# Altium PCB PCB1.PcbDoc
Units mil, origin at the board's own origin, x right, y up, seen from the top; angles counter-clockwise.
Board outline 3937.01 x 2165.35 mil, 2 copper layers (Top Layer, Bottom Layer); 16 components, 34 nets, 149 pads, 24 vias.
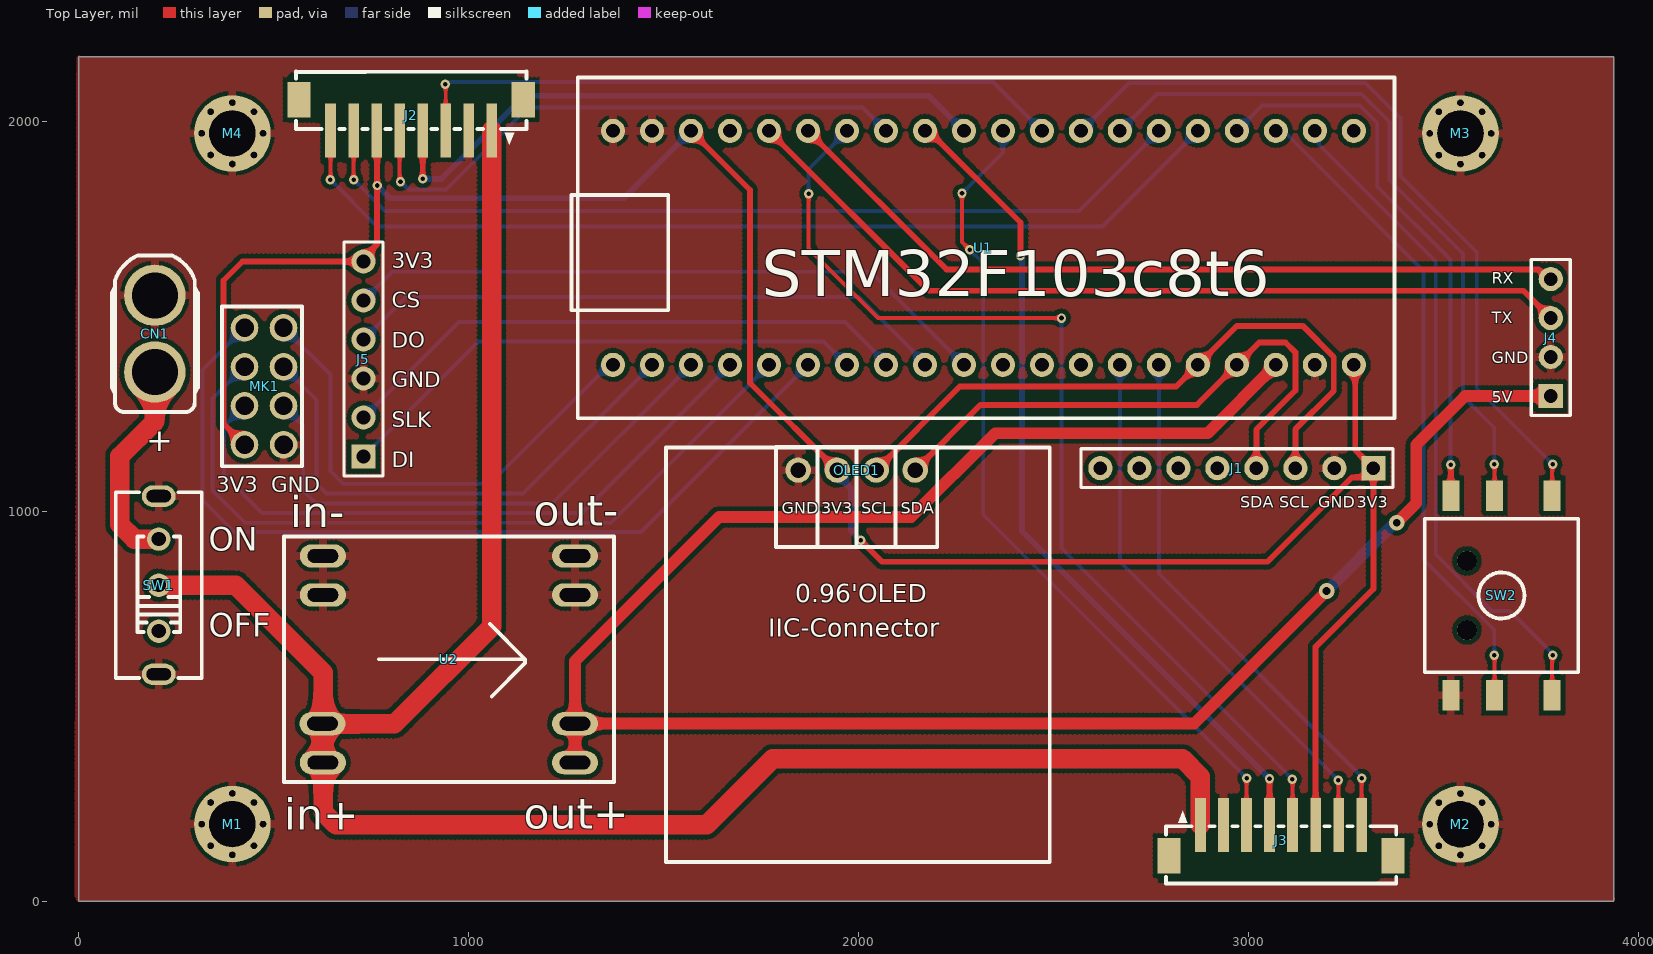
[diagram p0: Top Layer view]
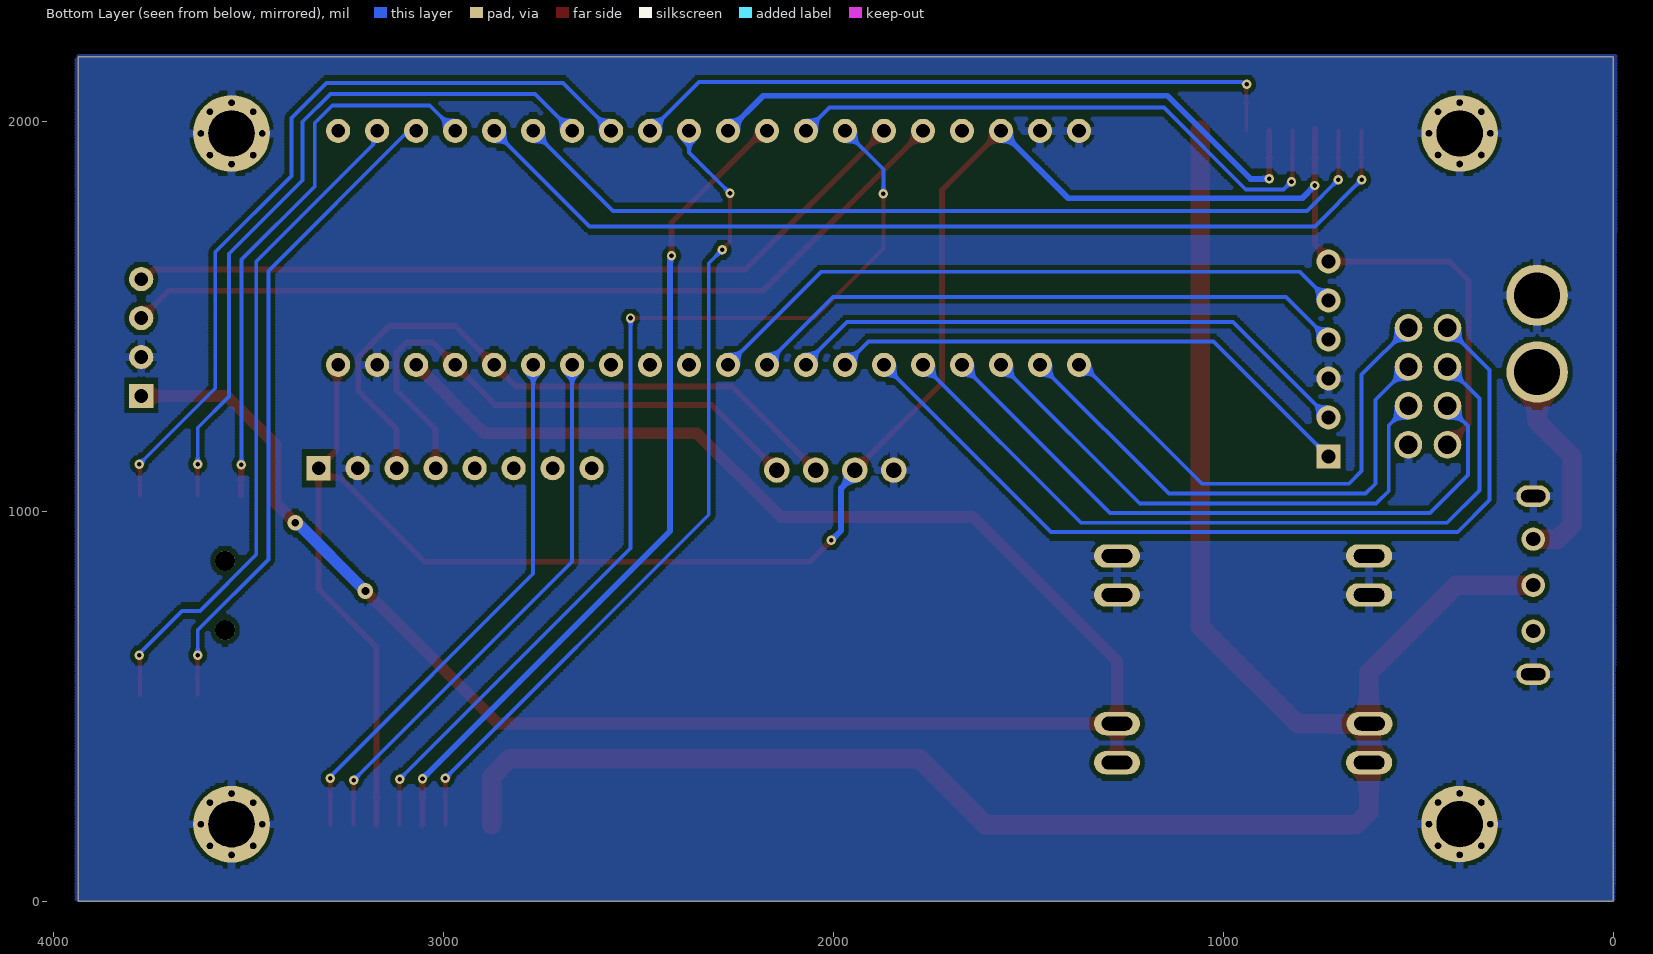
[diagram p1: Bottom Layer view, seen from below]

## Layer stack, top to bottom
Top Solder: solder mask 0.4, Solder Resist, Dk 3.5
Top Layer: signal copper 1.4
Dielectric 1: dielectric 12.6, FR-4, Dk 4.8
Bottom Layer: signal copper 1.4
Bottom Solder: solder mask 0.4, Solder Resist, Dk 3.5

## Board outline
0,0 3937.01,0 3937.01,2165.35 0,2165.35

## Design rules (kind name [scope] priority, off if disabled: settings)
Clearance [All] p1: gap=10 ignorepadtopadclearanceinfootprint=FALSE except(0: Arc-Hole Track-Hole SMDPad-Hole THPad-Hole Via-Hole Fill-Hole Poly-Hole Region-Hole Text-Hole; 12: Arc-Fill Arc-Poly Arc-Region Track-Fill Track-Poly Track-Region SMDPad-Fill SMDPad-Poly SMDPad-Region THPad-Fill THPad-Poly THPad-Region Via-Fill Via-Poly Via-Region Fill-Fill Fill-Poly Fill-Region Poly-Poly Poly-Region Region-Region)
PolygonConnect [All] p1: connectstyle=Relief reliefconductorwidth=20 reliefentries=4 polygonreliefangle="90 Angle" airgapwidth=10
RoutingVias [All] p1: holewidth=12 width=24 viastyle="Through Hole" minholewidth=12 minwidth=24 maxholewidth=12 maxwidth=24
SolderMaskExpansion [All] p1: expansion=4 istentingtop=FALSE
Width [All] p1: maxlimit=50 minlimit=10 preferedwidth=10
30 further rules are at their usual default settings.

## Components (designator, comment, footprint, x,y, rotation, side; value= is the part's Value field where it differs from the comment)
CN1 "XT30UPB-F" XT30 195,1455 r180 top locked
J1 "HDR-M-2.54_1x8" HDR-M-2.54_1X8 2920,1110 r180 top locked
J2 "zh1.5-8p" ZH1.5-8P 852.4,2019.73 r180 top locked
J3 "zh1.5-8p" ZH1.5-8P 3083.31,151.53 r0 top locked
J4 "HDR-M-2.54_1x4" HDR-M-2.54_1X4 3775,1445 r90 top
J5 "HDR-M-2.54_1x8" HDR-M-2.54_1X6 730,1390 r90 top
M1 "M3" M3 393.7,196.85 r0 top locked
M2 "M3" M3 3543.31,196.57 r0 top locked
M3 "M3" M3 3543.31,1968.23 r0 top locked
M4 "M3" M3 393.7,1968.5 r0 top locked
MK1 "NRF24L01" NRF24L01 21.2,1390.8 r90 top
OLED1 "0.96OLED_4P_MODULE_JX" 0.96OLED_4P 1995.01,1104.94 r0 top locked
SW1 "SS-12F44-G6" SW-TH_SS-12F44-GX 205,810 r90 top locked
SW2 "KEY_5" KEY_5 3518.66,527.68 r90 top
U1 "STM32F103c8t6" STM32F103COREBOARD 2211.69,1730 r0 top locked
U2 "5v_buck" 5V_BUCK 949.11,619.96 r0 top

## Footprints (in the part's own frame and the unit in brackets; to place one, negate y for a bottom-side part, rotate by r counter-clockwise, add the part's x,y. Pads: shape width x height; smd on the part's side, far side on the other; paste and mask are expansions set on the pad)
0.96OLED_4P [mm]
  round 1.65 hole 1 paste+0 mask+0.051: 1(-3.81,-0.001) 2(-1.27,0.002) 3(1.27,0.002) 4(3.81,0.002)
  silkscreen extent -12.43,-25.53 12.57,1.5
5V_BUCK [mm]
  oval 3x1.524 hole 0.9 slot 2 at 0 deg paste+0 mask+0.051: 1(-8.21,4.19) 1(-8.21,6.73) 2(-8.232,-4.19) 2(-8.21,-6.73) 3(8.21,6.73) 3(8.21,4.19) 4(8.21,-6.73) 4(8.21,-4.19)
  silkscreen extent -10.75,-8 10.75,8
HDR-M-2.54_1X4 [mil]
  rect 62x62 hole 35 paste+0 mask+2: 1(-150,0)
  round 62 hole 35 paste+0 mask+2: 2(-50,0) 3(50,0) 4(150,0)
  silkscreen extent -200,-50 200,50
HDR-M-2.54_1X6 [mil]
  rect 62x62 hole 35 paste+0 mask+2: 1(-250,0)
  round 62 hole 35 paste+0 mask+2: 2(-150,0) 3(-50,0) 4(50,0) 5(150,0) 6(250,0)
  silkscreen extent -300,-50 300,50
HDR-M-2.54_1X8 [mil]
  rect 62x62 hole 35 paste+0 mask+2: 1(-400,0)
  round 62 hole 35 paste+0 mask+2: 2(-300,0) 3(-200,0) 4(-100,0) 5(0,0) 6(100,0) 7(200,0) 8(300,0)
  silkscreen extent -450,-50 350,50
KEY_5 [mm] "五向导航按键"
  round 1.3 hole 1.3: 0(4.25,-1.05) 0(8.75,-1.05)
  rect 2x1.1 smd: 1(0,0) 2(0,-2.85) 3(0,-6.6) 4(13,0) 5(13,-2.85) 6(13,-6.6)
  silkscreen extent 1.5,-8.3 11.5,1.7
M3 [mm]
  round 0.6 hole 0.4 slot 0.405 at 0 deg paste+0 mask+0.051: 1(-2,0.007) 1(-1.41,-1.403) 1(-1.41,1.417) 1(0,-1.993) 1(0,2.007) 1(1.41,-1.403) 1(1.41,1.417) 1(2,0.007)
  round 5 hole 3 slot 3.005 at 0 deg paste+0 mask+0.051: 1(0,0.007)
NRF24L01 [mm]
  round 1.8 hole 1.2 paste+0 mask+0.051: 1(-5.606,-12.799) 2(-5.608,-10.256) 3(-3.068,-12.796) 4(-3.068,-10.256) 5(-0.528,-12.796) 6(-0.528,-10.256) 7(2.012,-12.796) 8(2.012,-10.256)
  silkscreen extent -7,-14 3.4,-8.8
STM32F103COREBOARD [mil]
  round 62 hole 35 paste+0 mask+4: 1(-841.69,-355) 2(-741.69,-355) 3(-641.69,-355) 4(-541.69,-355) 5(-441.69,-355) 6(-341.69,-355) 7(-241.69,-355) 8(-141.69,-355) 9(-41.69,-355) 10(58.31,-355) 11(158.31,-355) 12(258.31,-355) 13(358.31,-355) 14(458.31,-355) 15(558.31,-355) 16(658.31,-355) 17(758.31,-355) 18(858.31,-355) 19(958.31,-355) 20(1058.31,-355) 21(1058.31,245) 22(958.31,245) 23(858.31,245) 24(758.31,245) 25(658.31,245) 26(558.31,245) 27(458.31,245) 28(358.31,245) 29(258.31,245) 30(158.31,245) 31(58.31,245) 32(-41.69,245) 33(-141.69,245) 34(-241.69,245) 35(-341.69,245) 36(-441.69,245) 37(-541.69,245) 38(-641.69,245) 39(-741.69,245) 40(-841.69,245)
  silkscreen extent -948,-492 1162,382
SW-TH_SS-12F44-GX [mm]
  round 1.524 hole 0.914 paste+0 mask+0.051: 1(-3,0) 2(0,0) 3(3,0)
  oval 1.4x2.2 hole 0.8 slot 1.6 at 90 deg paste+0 mask+0.051: 4(5.8,0) 5(-5.8,0)
  silkscreen extent -6.05,-2.8 6.05,2.8
XT30 [mm]
  round 4 hole 3 paste+0 mask+0.102: 1(0,2.5) 2(0,-2.5)
  silkscreen extent -2.8,-5.1 2.8,5.1
ZH1.5-8P [mm]
  rect 0.7x3.5 smd paste+0 mask+0.051: 1(-5.25,1.104) 2(-3.75,1.104) 3(-2.25,1.104) 4(-0.75,1.104) 5(0.75,1.104) 6(2.25,1.104) 7(3.75,1.104) 8(5.25,1.104)
  rect 1.5x2.3 smd paste+0 mask+0.051: ""(-7.3,-0.896) ""(7.3,-0.896)
  silkscreen extent -7.5,-2.73 7.5,2.04

## Part data
CN1: library part XT30
J5: library part HDR-M-2.54_1x6, BOM_Supplier=LCSC, BOM_Supplier Part=C190820, Contributor=LCEDA_Lib, spicePre=J, spiceSymbolName=HDR-M-2.54_1x8
OLED1: BOM_JLCPCB Part Class="Extended Part", BOM_Manufacturer=null, BOM_Manufacturer Part=0.96OLED_4P_MODULE_JX, BOM_Supplier=LCSC, BOM_Supplier Part=C9900004566, Contributor=LCSC, spicePre=O, spiceSymbolName=0.96OLED_4P_MODULE_JX
SW1: BOM_JLCPCB Part Class="Extended Part", BOM_Manufacturer=USAKRO, BOM_Manufacturer Part=SS-12F44-G6, BOM_Supplier=LCSC, BOM_Supplier Part=C698210, Contributor=LCSC, spicePre=S, spiceSymbolName=SS-12F44-G6
SW2: "五向导航按钮"
U1: Package Display=Yes, Contributor=fsxqn, spicePre=U, spiceSymbolName=STM32F103c8t6最小系统板
J1 J2 J3: BOM_Supplier=LCSC, BOM_Supplier Part=C190820, Contributor=LCEDA_Lib, spicePre=J, spiceSymbolName=HDR-M-2.54_1x8
J4: BOM_Supplier=LCSC, BOM_Supplier Part=C124378, Contributor=LCEDA_Lib, spicePre=J, spiceSymbolName=HDR-M-2.54_1x4
U2: Contributor=fsxqn, spicePre=U, spiceSymbolName=5v_buck

## Via types
v1: diameter 24, hole 12, Top Layer to Bottom Layer, tented both sides, 22 vias
v2: diameter 40, hole 20, Top Layer to Bottom Layer, tented both sides, 2 vias

## Nets (pads, with @x,y where several pads share a name; then routed paths per layer and width w, separated by ;. In a path a pad name is that pad's centre, name@x,y a point inside that pad or via, vN(x,y) a via of type N, cw(c..) or ccw(c..) an arc to the next point about the centre after c; other vN are vias at no path point)
3V3: J1.1 J2.6 J3.6 J5.6 MK1.2 OLED1.2 U1.20 U1.38 | length 6000.6
  Top Layer w15: MK1.2 371.21,1223.79 371.21,1591.21 420,1640 J5.6 730,1649.1 765,1684.1 v1(765,1835) 765,1980 763.82,1978.82 J2.6 ; U1.38 1721.5,1823.5 1721.5,1328.5 OLED1.2 ; v1(2005,925) 2060,870 3048.59,870 3265.09,1086.5 3296.5,1086.5 J1.1 ; J3.6 3171.9,651.89 3320,800 J1.1 ; U1.20 3273.5,1371.5 3273.5,1156.5 J1.1
  Bottom Layer w15: v1(765,1835) 797.57,1802.43 1397.43,1802.43 U1.38 ; OLED1.2 1945,1093.8 1980,1058.8 1980,950 v1(2005,925)
5V: J4.1 U1.18 U2.4 | length 5316
  Top Layer w30: U2.4@1272.34,355 U2.4@1272.34,454.99 ; U1.18 2895,1200 2350,1200 2135,985 1642.26,985 1272.34,615.09 U2.4@1272.34,454.99 ; v2(3200,795) 2859.99,454.99 U2.4@1272.34,454.99 ; v2(3380,970) 3430,1020 3430,1170 3555,1295 J4.1
  Bottom Layer w30: v2(3200,795) 3375,970 v2(3380,970) v2@3385,970
bluetooth_rx: J4.4 U1.35 | length 2062.4
  Top Layer w15: U1.35 2225,1620 3742.71,1620 3767.71,1595 J4.4
bluetooth_tx: J4.3 U1.36 | length 2203.8
  Top Layer w15: U1.36 2180,1565 3705,1565 J4.3
CE: MK1.3 U1.3 | length 1394.8
  Bottom Layer w10: MK1.3 575.53,1219.47 575.53,1051.48 607.97,1019.04 1214.04,1019.04 U1.3
CS: J5.5 U1.10 | length 1669.4
  Bottom Layer w10: J5.5 803.67,1613.67 2031.33,1613.67 U1.10
CSN: MK1.4 U1.4 | length 1693.9
  Bottom Layer w10: MK1.4 372.74,1217.74 372.74,1092.26 469.44,995.56 1290.56,995.56 U1.4
DI: J5.1 U1.7 | length 1387
  Bottom Layer w10: J5.1 1025,1435 1910,1435 U1.7
DO: J5.4 U1.9 | length 1560.1
  Bottom Layer w10: J5.4 838.92,1548.92 2001.08,1548.92 2170,1380 U1.9
GND: CN1.2 J1.2 J2.2 J3.2 J4.2 J5.3 M1.1 M2.1 M3.1 M4.1 MK1.1 OLED1.1 SW1.4 SW1.5 SW2.1 U1.19 U1.39 U1.40 U2.1 U2.3
iic_scl: J1.3 OLED1.3 U1.16 | length 1685.7
  Top Layer w15: OLED1.3 2259.25,1319.25 2814.25,1319.25 U1.16 2970,1475 3138.59,1475 3218.5,1395.09 3218.5,1308.15 3120,1209.65 J1.3
iic_sda: J1.4 OLED1.4 U1.17 | length 1459.3
  Top Layer w15: OLED1.4 2312.5,1272.5 2867.5,1272.5 U1.17 3027.18,1432.18 3094.91,1432.18 3119.84,1407.24 3119.84,1309.5 3020,1209.65 J1.4
IRQ: MK1.8 U1.6 | length 2251.2
  Bottom Layer w10: MK1.8 316.78,1361.78 316.78,1028.22 398.55,946.45 1441.45,946.45 U1.6
M1BRK: J2.3 U1.29 | length 1703
  Top Layer w10: v1(940,2095) 940.98,2094.02 J2.3
  Bottom Layer w10: v1(940,2095) 942.68,2097.68 950.54,2097.68 952.86,2100 2345,2100 U1.29
M1Dir: J2.5 U1.33 | length 1497.3
  Top Layer w10: J2.5 822.87,1847.13 v1(825,1845)
  Bottom Layer w10: v1(825,1845) 845.07,1824.93 942.34,1824.93 1152.41,2035 2010,2035 U1.33
M1Encoder1: J2.8 U1.25 | length 2502.7
  Top Layer w10: v1(645,1850) 645.71,1850.71 J2.8
  Bottom Layer w10: v1(645,1850) 765,1730 2625,1730 U1.25
M1Encoder2: J2.7 U1.26 | length 2309.5
  Top Layer w10: J2.7 704.77,1850.23 v1(705,1850)
  Bottom Layer w10: v1(705,1850) 785.17,1769.83 2564.83,1769.83 U1.26
M1PWM: J2.4 U1.31 | length 1640.7
  Top Layer w15: v1@880,1850 v1(881.93,1851.93) J2.4
  Bottom Layer w15: v1(881.93,1851.93) 929.72,1851.93 1142.79,2065 2180,2065 U1.31
M2BRK: J3.3 U1.30 | length 2126
  Top Layer w10: v1(2265,1815) 2265,1690 v1(2285,1670) ; J3.3 2994.73,314.74 v1(2995,315)
  Bottom Layer w10: v1(2265,1815) 2370,1920 U1.30 ; v1(2285,1670) 2319.5,1635.5 2319.5,990.5 v1(2995,315)
M2Dir: J3.5 U1.34 | length 2610.1
  Top Layer w10: v1(1871.72,1814.1) 1871.72,1673.28 2050,1495 v1(2520,1495) ; v1(3112.05,312.62) 3112.84,311.82 J3.5
  Bottom Layer w10: v1(1871.72,1814.1) 1871.72,1876.73 U1.34 ; v1(2520,1495) 2520,904.66 v1(3112.05,312.62)
M2Encoder1: J3.7 U1.14 | length 1412.4
  Top Layer w10: v1(3230,310) 3230.47,309.53 3230.47,195.47 J3.7
  Bottom Layer w10: U1.14 2670,870 v1(3230,310)
M2Encoder2: J3.8 U1.15 | length 1395.4
  Top Layer w10: J3.8 v1(3290,315)
  Bottom Layer w10: U1.15 2770,839.18 3283,326.18 3283,325.79 3290,318.79 v1(3290,315)
M2PWM: J3.4 U1.32 | length 2153.7
  Top Layer w15: U1.32 2180,1975 2415,1740 v1(2415,1655) ; J3.4 v1(3053.78,313.78) v1@3055,315
  Bottom Layer w15: v1(2415,1655) 2418.5,1651.5 2418.5,949.07 v1(3053.78,313.78)
MISO: MK1.7 U1.1 | length 1281.8
  Bottom Layer w10: MK1.7 645,1350 645,1102.86 677.86,1070 1055,1070 1360,1375 U1.1
MOSI: MK1.6 U1.5 | length 1980
  Bottom Layer w10: MK1.6 343.23,1288.23 343.23,1052.63 425.86,970 1365,970 U1.5
NetCN1_1: CN1.1 SW1.3 | length 543.9
  Top Layer w50: CN1.1 195.01,1230.17 104.92,1140.08 104.92,965.69 142.5,928.11 SW1.3
PA2: SW2.5 U1.27 | length 1831.1
  Top Layer w10: v1(3630,1120) 3630.87,1119.13 SW2.5
  Bottom Layer w10: U1.27 2765,2070 3290,2070 3361.43,1998.57 3361.43,1848.57 3550,1660 3550,1293.79 3630,1213.79 v1(3630,1120)
PA3: SW2.6 U1.28 | length 2038.8
  Top Layer w10: SW2.6 3778.5,1118.5 v1(3780,1120)
  Bottom Layer w10: U1.28 2692.9,2097.9 3300.02,2097.9 3390,2007.92 3390,1859.04 3585,1664.04 3585,1315 v1(3780,1120)
PC13: SW2.3 U1.22 | length 1727.2
  Top Layer w10: SW2.3 3778.5,628.5 v1(3780,630)
  Bottom Layer w10: U1.22 3179.95,1965.05 3179.95,1940.49 3479.88,1640.57 3479.88,888.68 3624.54,744.02 3669.88,744.02 3773,640.89 3773,640.79 3780,633.79 v1(3780,630)
PC14: SW2.2 U1.23 | length 1691.2
  Top Layer w10: v1(3630,630) 3630.87,629.13 SW2.2
  Bottom Layer w10: U1.23 3079.95,1965.05 3099.76,1965.05 3448.86,1615.95 3448.86,876.14 3630,695 v1(3630,630)
PC15: SW2.4 U1.24 | length 1441.1
  Top Layer w15: SW2.4 v1(3518.66,1118.66) v1@3520,1120
  Bottom Layer w10: U1.24 3035,2040 3285,2040 3330,1995 3330,1832.58 3517.76,1644.82 3517.76,1119.56 v1(3518.66,1118.66)
SCK: MK1.5 U1.2 | length 1342.9
  Bottom Layer w10: MK1.5 609.35,1285.65 609.35,1070.16 634.91,1044.6 1139.6,1044.6 U1.2
SLK: J5.2 U1.8 | length 1490
  Bottom Layer w10: J5.2 865,1375 975,1485 1965,1485 2070,1380 U1.8
VBAT: J2.1 J3.1 SW1.2 U2.2 | length 5167.8
  Top Layer w50: SW1.2 401.88,810 626.32,585.56 626.32,456.32 U2.2@625,455 ; U2.2@625.88,355 625.44,355.44 625.44,454.56 809.56,454.56 1059.09,704.09 J2.1 ; U2.2@626.77,365.04 626.77,228.23 660,195 1610,195 1780,365 2830,365 2876.62,318.38 J3.1
pads on no net: J1.5 J1.6 J1.7 J1.8 J2. J3. SW1.1 SW2.0 U1.11 U1.12 U1.13 U1.21 U1.37

## Polygon pours and split planes (outlines as drawn)
GND on Top Layer "GND_L01_P008" (hatched 45Degree grid 8 track 13, remove dead copper, pour order 8): 0,2165 5,2160 3930,2160 3930,10 3935,5 -5,5
no net on Top Layer "NONET_L01_P000" (solid, pour order 0): 2994.73,334.74
GND on Bottom Layer "GND_L02_P009" (hatched Horizontal grid 8 track 13, remove dead copper, pour order 9): -5,2170 3930,2170 3940,2160 3940,5 5,5 0,0

## Other copper
Top Layer:
  pour cut-out: 535,2130 1130,2130 1130,1990 535,1990
  pour cut-out: 2766.67,180 3430,180 3430,140 3330,40 2763.07,40
Bottom Layer:
  pour cut-out: 2006.85,2012.5 2006.85,2005.31 2002.84,2001.3 2005.81,1998.33 2005.81,1981.94 2029.67,1981.94 2031.38,1983.66 2031.38,1999.56
  pour cut-out: 3037.34,2017.83 3010.09,1990.58 3010.09,1979.01 3040.37,1980.75 3040.37,2006.46

## Silkscreen, mask and mechanical layers (free items; w line width, h text height)
Top Overlay:
  text "3V3" at 803,1623 h40
  text "RX" at 3623,1583 h30
  text "CS" at 803,1521 h40
  text "TX" at 3623,1481.33 h30
  text "DO" at 803,1419 h40
  text "GND" at 3623,1379.67 h30
  text "GND" at 803,1317 h40
  text "5V" at 3623,1278 h30
  text "SLK" at 803,1215 h40
  text "+" at 173,1153 h60
  text "DI" at 803,1113 h40
  text "3V3" at 353,1048 h40
  text "GND" at 493,1048 h40
  text "SDA" at 2978,1008 h30
  text "SCL" at 3078,1008 h30
  text "GND" at 3178,1008 h30
  text "3V3" at 3278,1008 h30
  text "GND" at 1803,993 h30
  text "3V3" at 1904.67,993 h30
  text "SCL" at 2006.33,993 h30
  text "SDA" at 2108,993 h30
  text "ON" at 333,898 h60
  text "OFF" at 333,678 h60
Mechanical 1:
  the board outline again, w30

## Text inside footprints (layer, text, board x,y; h text height)
OLED1: Top Overlay "IIC-Connector" at 1768.41,677.88 h47.24; Top Overlay "0.96'OLED" at 1837.61,766.37 h47.24
U2: Top Overlay "in-" at 542.11,957.96 h80; Top Overlay "in+" at 527.11,182.96 h80; Top Overlay "out+" at 1141.51,185.43 h80; Top Overlay "out-" at 1167.11,962.96 h80